# EAGLE board Smersh2 (EAGLE 9.1.3)
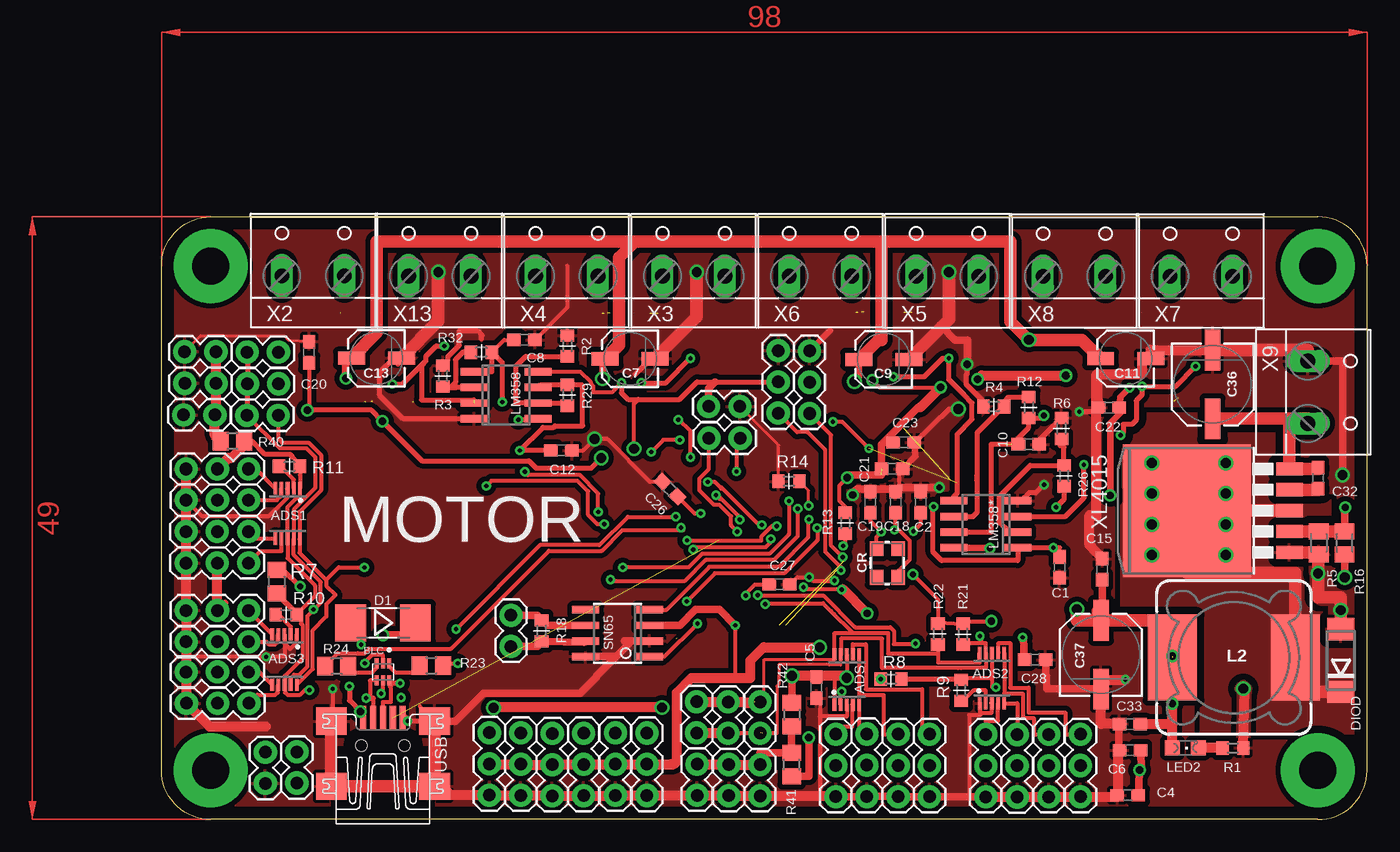
[diagram p0: board, top side]
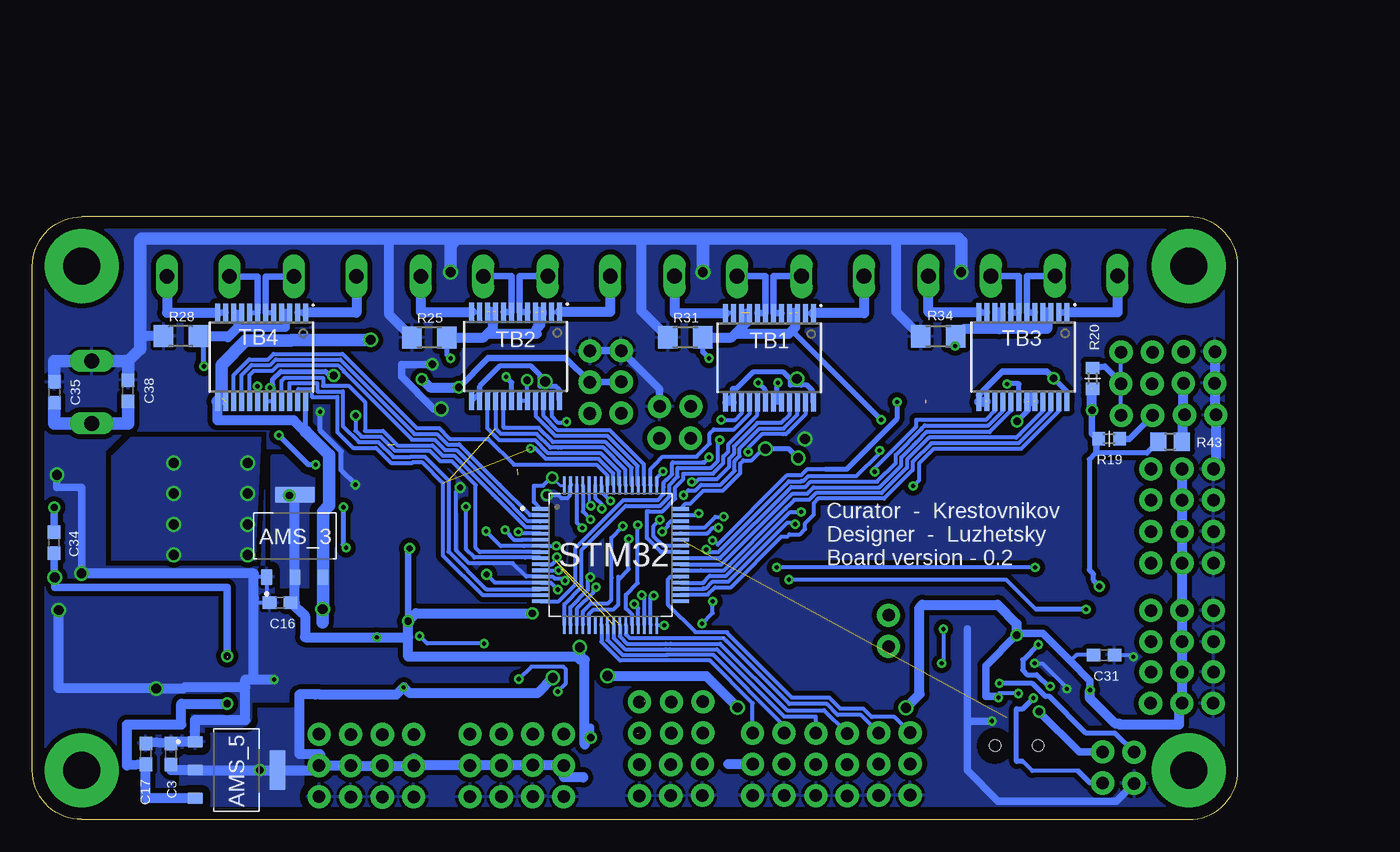
[diagram p1: board, bottom side, seen from below]

Size 98 x 49 mm. Coordinates in mm from the lower left corner, seen from the top.
Outline: 4,49 94,49 arc-90 98,45 98,4 arc-90 94,0 4,0 arc-90 0,4 0,45 arc-90 4,49
Copper layers (1*16): Top 0.035mm / dielectric 1.5mm / Bottom 0.035mm
Design rules "default *": minimum track width 6mil, minimum drill 0.35mm, track to track 2mil, track to pad 4mil, pad to pad 4mil, via to via 4mil, smd to smd 4mil, copper to edge 40mil, drill to drill 6mil, minimum pad ring 10mil, minimum via ring 8mil, stop-mask expansion 2mil, vias tented up to drill 10mm, thermal gap 10mil
Net classes: 0 default: clearance 0.205 mm

## Footprints (pad centres in the part's own frame; a part is rotated, then mirrored left to right if it is on the bottom)
MSOP10 = smd 0.3 x 1: 1 -1,-2.05; 2 -0.5,-2.05; 3 0,-2.05; 4 0.5,-2.05; 5 1,-2.05; 6 1,2.05; 7 0.5,2.05; 8 0,2.05; 9 -0.5,2.05; 10 -1,2.05
SOT229P700X180-4N = smd 1.31 x 0.93: 1 -3.345,2.29; 2 -3.345,0; 3 -3.345,-2.29 | smd 1.31 x 3.24: 4 3.345,0
SOT50P160X60-6N = smd 0.75 x 0.35: 1 -0.69,0.5; 2 -0.69,0; 3 -0.69,-0.5; 4 0.69,-0.5; 5 0.69,0; 6 0.69,0.5
C0603 = smd 1.1 x 1: 1 -0.85,0; 2 0.85,0
CSV-B = smd 2.184 x 1.067: + -2.032,0; - 2.032,0
CSV-D = smd 3.302 x 1.27: + -2.794,0; - 2.794,0
CRYSTAL-SMD-3.2X2.5MM = smd 1.2 x 1.1: 1 -1.175,-0.875; 2 1.175,-0.875; 3 1.175,0.875; 4 -1.175,0.875
MELF-MLL41 = smd 2.5 x 3: A 2.625,0; C -2.625,0
DO214AA = smd 1.8 x 2.2: A 2.55,0; C -2.55,0
1X02 = drill 1.016 pad 1.88: 1 0,0; 2 2.54,0
SSR1208 = smd 7 x 4: 1 0,5; 2 0,-5
CHIPLED_0805 = smd 1.2 x 1.2: A 0,-1.05; C 0,1.05
LM358 = smd 0.6 x 2.2: 1 -1.905,-2.6; 2 -0.635,-2.6; 3 0.635,-2.6; 4 1.905,-2.6; 5 1.905,2.6; 6 0.635,2.6; 7 -0.635,2.6; 8 -1.905,2.6
R0603 = smd 1 x 1.1: 1 -0.85,0; 2 0.85,0
M0805 = smd 1.3 x 1.6: 1 -0.95,0; 2 0.95,0
R0805 = smd 1.3 x 1.5: 1 -0.95,0; 2 0.95,0
R1206 = smd 1.6 x 1.803: 1 -1.422,0; 2 1.422,0
SOIC8 = smd 0.6 x 2.2: 1 -1.905,-2.6; 2 -0.635,-2.6; 3 0.635,-2.6; 4 1.905,-2.6; 5 1.905,2.6; 6 0.635,2.6; 7 -0.635,2.6; 8 -1.905,2.6
QFP50P1200X1200X160-64N = smd 1.47 x 0.28: 1 -5.67,3.75; 2 -5.67,3.25; 3 -5.67,2.75; 4 -5.67,2.25; 5 -5.67,1.75; 6 -5.67,1.25; 7 -5.67,0.75; 8 -5.67,0.25; 9 -5.67,-0.25; 10 -5.67,-0.75; 11 -5.67,-1.25; 12 -5.67,-1.75; 13 -5.67,-2.25; 14 -5.67,-2.75; 15 -5.67,-3.25; 16 -5.67,-3.75; 33 5.67,-3.75; 34 5.67,-3.25; 35 5.67,-2.75; 36 5.67,-2.25; 37 5.67,-1.75; 38 5.67,-1.25; 39 5.67,-0.75; 40 5.67,-0.25; 41 5.67,0.25; 42 5.67,0.75; 43 5.67,1.25; 44 5.67,1.75; 45 5.67,2.25; 46 5.67,2.75; 47 5.67,3.25; 48 5.67,3.75 | smd 0.28 x 1.47: 17 -3.75,-5.67; 18 -3.25,-5.67; 19 -2.75,-5.67; 20 -2.25,-5.67; 21 -1.75,-5.67; 22 -1.25,-5.67; 23 -0.75,-5.67; 24 -0.25,-5.67; 25 0.25,-5.67; 26 0.75,-5.67; 27 1.25,-5.67; 28 1.75,-5.67; 29 2.25,-5.67; 30 2.75,-5.67; 31 3.25,-5.67; 32 3.75,-5.67; 49 3.75,5.67; 50 3.25,5.67; 51 2.75,5.67; 52 2.25,5.67; 53 1.75,5.67; 54 1.25,5.67; 55 0.75,5.67; 56 0.25,5.67; 57 -0.25,5.67; 58 -0.75,5.67; 59 -1.25,5.67; 60 -1.75,5.67; 61 -2.25,5.67; 62 -2.75,5.67; 63 -3.25,5.67; 64 -3.75,5.67
SOP65P760X160-24N = smd 1.5 x 0.4: 1 -3.625,3.575; 2 -3.625,2.925; 3 -3.625,2.275; 4 -3.625,1.625; 5 -3.625,0.975; 6 -3.625,0.325; 7 -3.625,-0.325; 8 -3.625,-0.975; 9 -3.625,-1.625; 10 -3.625,-2.275; 11 -3.625,-2.925; 12 -3.625,-3.575; 13 3.625,-3.575; 14 3.625,-2.925; 15 3.625,-2.275; 16 3.625,-1.625; 17 3.625,-0.975; 18 3.625,-0.325; 19 3.625,0.325; 20 3.625,0.975; 21 3.625,1.625; 22 3.625,2.275; 23 3.625,2.925; 24 3.625,3.575
1X03 = drill 1.016 pad 1.88: 1 0,0; 2 2.54,0; 3 5.08,0
UX60-MB-5ST = smd 2 x 0.5: 1 2.25,1.6; 2 2.25,0.8; 3 2.25,0; 4 2.25,-0.8; 5 2.25,-1.6 | smd 2.2 x 2.5: M1 -3.3,-4.2; M2 -3.3,4.2; M3 2,4.2; M4 2,-4.2 | hole 0.9: 0,-1.75; 0,1.75
W237-132 = drill 1.194 long: 1 -2.54,-0.635; 2 2.54,-0.635
TO263-5L = smd 1.067 x 2.159: 1 -3.404,-4.521; 2 -1.702,-4.521; 3 0,-4.521; 4 1.702,-4.521; 5 3.404,-4.521 | smd 10.8 x 10.41: 6 0,3.81

## Placement (x,y rotation side)
ADS  ADS1115IRUGT  [MSOP10]  55.7,11.38 0 top
ADS1  ADS1115IRUGT  [MSOP10]  10.25,24.88 180 top
ADS2  ADS1115IRUGT  [MSOP10]  67.5,11.5 0 top
ADS3  ADS1115IRUGT  [MSOP10]  10,13 180 top
AMS_3  AMS1117  [SOT229P700X180-4N]  76.67,23.06 90 bottom
AMS_5  AMS1117  [SOT229P700X180-4N]  81.42,4.02 0 bottom
BLC  USBLC6-2P6  [SOT50P160X60-6N]  18,12 270 top
C1  0.1uF  [C0603]  73,20.5 270 top
C2  100n  [C0603]  61.71,25.81 90 top
C3  0.1u  [C0603]  86.73,5.33 90 bottom
C4  0.1u  [C0603]  78.54,1.97 0 top
C5  0.1u  [C0603]  53.24,10.72 90 top
C6  0.1u  [C0603]  78.72,5.63 0 top
C7  100u  [CSV-B]  38.09,37.46 0 top
C8  0.1uF  [C0603]  29.5,39 0 top
C9  100u  [CSV-B]  58.71,37.41 0 top
C10  0.1uF  [C0603]  70.5,30.5 0 top
C11  100u  [CSV-B]  78.37,37.47 0 top
C12  0.1uF  [C0603]  32.5,30 0 top
C13  100u  [CSV-B]  17.47,37.51 0 top
C15  0.1u  [C0603]  76.46,20.34 90 top
C16  0.1u  [C0603]  77.86,17.63 180 bottom
C17  0.1u  [C0603]  88.77,5.34 90 bottom
C18  22pF  [C0603]  59.67,25.81 90 top
C19  22pF  [C0603]  57.62,25.8 90 top
C20  0.1uF  [C0603]  12,38 90 top
C21  0.1uF  [C0603]  59.4,28.51 0 top
C22  0.1uF  [C0603]  77,33.5 180 top
C23  4.7uF <- to 48 pin  [C0603]  60.34,30.66 0 top
C26  0.1uF  [C0603]  41.33,26.86 135 top
C27  0.1uF  [C0603]  50.23,19.12 0 top
C28  0.1u  [C0603]  71,13 180 top
C31  0.1u  [C0603]  10.89,13.37 180 bottom
C32  0.1u  [C0603]  94.01,27.76 270 top
C33  0.1u  [C0603]  78.71,7.76 180 top
C34  33n  [C0603]  96.23,22.5 90 bottom
C35  0.1u  [C0603]  96.21,34.73 90 bottom
C36  220u  [CSV-D]  85.44,35.38 90 top
C37  330u  [CSV-D]  76.37,13.4 270 top
C38  0.1µF  [C0603]  90.22,34.87 270 bottom
CR  8M  [CRYSTAL-SMD-3.2X2.5MM]  58.99,20.85 90 top
D1  [MELF-MLL41]  18,16 180 top
DIOD  SK54  [DO214AA]  95.87,12.93 90 top
J1  [1X02]  11,5.5 270 top
J2  [1X02]  8.44,5.47 270 top
J23  [1X02]  44.5,31 0 top
J25  [1X02]  44.47,33.58 0 top
J27  [1X02]  28.41,14.07 90 top
J28  [1X02]  9.52,35.43 180 top
J29  [1X02]  4.43,35.47 180 top
J30  [1X02]  43.5,9.58 270 top
J31  [1X02]  46.11,4.47 270 top
J32  [1X02]  46.06,9.56 270 top
J33  [1X02]  48.65,4.46 270 top
J34  [1X02]  48.65,9.56 270 top
J35  [1X02]  43.53,4.5 270 top
J36  [1X02]  9.48,32.86 180 top
J37  [1X02]  4.34,32.9 180 top
J38  [1X02]  9.5,38 180 top
J39  [1X02]  4.42,38.03 180 top
L2  SRR1208  [SSR1208]  87.16,13.17 270 top
LED2  [CHIPLED_0805]  83.22,5.82 270 top
LM358  LM358  [LM358]  28,34.5 270 top
LM358*  LM358  [LM358]  67,24 90 top
R1  1k  [R0603]  87.09,5.81 0 top
R2  50  [R0603]  33,38.5 90 top
R3  50  [R0603]  22.87,36.06 90 top
R4  50  [R0603]  67.65,33.58 180 top
R5  3k  [M0805]  94.07,22.49 90 top
R6  50  [R0603]  73.15,31.79 90 top
R7  120Ohm - ???  [R0805]  9.36,19.35 270 top
R8  10k  [R0603]  59.3,11.42 0 top
R9  10k  [R0603]  65,10.5 90 top
R10  10k  [R0603]  10.13,16.66 180 top
R11  10k  [R0603]  10.4,28.71 180 top
R12  1k  [R0603]  70.5,33.5 90 top
R13  10k  [R0603]  55.59,24.1 90 top
R14  10k  [R0603]  51,27.5 180 top
R16  113k  [M0805]  96.17,22.49 270 top
R18  120Ohm - ???  [R0603]  30.89,15.34 90 top
R19  47k  [R0603]  10.47,30.95 0 bottom
R20  47k  [R0603]  11.82,35.86 90 bottom
R21  47k  [R0603]  65.15,15.07 270 top
R22  47k  [R0603]  63.11,15.08 270 top
R23  22  [R0805]  21.93,12.52 0 top
R24  22  [R0805]  14.23,12.46 180 top
R25  0.05  [R1206]  65.72,39.19 0 bottom
R26  1k  [R0603]  73.36,27.94 90 top
R28  0.05  [R1206]  85.92,39.3 0 bottom
R29  1k  [R0603]  33,34.5 270 top
R31  0.05  [R1206]  44.92,39.2 0 bottom
R32  1k  [R0603]  26,38 180 top
R34  0.05  [R1206]  24.36,39.28 0 bottom
R40  0  [R0805]  5.76,30.76 180 top
R41  0  [R0805]  51.22,4.46 90 top
R42  0  [R0805]  51.24,8.53 270 top
R43  0  [R0805]  5.51,30.73 0 bottom
SN65  SN65HVD233DR  [SOIC8]  37.07,15.15 90 top
STM32  STM32F405RGT6  [QFP50P1200X1200X160-64N]  51,21.5 0 bottom
TB1  TB6612FNG,C,8,EL  [SOP65P760X160-24N]  38.09,37.54 270 bottom
TB2  TB6612FNG,C,8,EL  [SOP65P760X160-24N]  58.72,37.65 270 bottom
TB3  TB6612FNG,C,8,EL  [SOP65P760X160-24N]  17.47,37.6 270 bottom
TB4  TB6612FNG,C,8,EL  [SOP65P760X160-24N]  79.37,37.59 270 bottom
TLE4945L1  455-1750-1-ND  [1X03]  62.43,1.85 90 top
TLE4945L2  455-1750-1-ND  [1X03]  59.88,1.85 90 top
TLE4945L3  455-1750-1-ND  [1X03]  54.81,1.85 90 top
TLE4945L4  455-1750-1-ND  [1X03]  2,28.5 0 top
TLE4945L5  455-1750-1-ND  [1X03]  1.99,20.86 0 top
TLE4945L6  455-1750-1-ND  [1X03]  1.99,23.41 0 top
TLE4945L7  455-1750-1-ND  [1X03]  2,25.97 0 top
TLE4945L8  455-1750-1-ND  [1X03]  67,1.84 90 top
TLE4945L9  455-1750-1-ND  [1X03]  74.7,1.85 90 top
TLE4945L10  455-1750-1-ND  [1X03]  57.34,1.87 90 top
TLE4945L11  455-1750-1-ND  [1X03]  72.12,1.84 90 top
TLE4945L12  455-1750-1-ND  [1X03]  69.55,1.83 90 top
TLE4945L13  455-1750-1-ND  [1X03]  2,17 0 top
TLE4945L14  455-1750-1-ND  [1X03]  2.02,9.45 0 top
TLE4945L15  455-1750-1-ND  [1X03]  2,12 0 top
TLE4945L16  455-1750-1-ND  [1X03]  2,14.45 0 top
TLE4945L17  455-1750-1-ND  [1X03]  50.13,33.04 90 top
TLE4945L18  455-1750-1-ND  [1X03]  52.67,33.01 90 top
TLE4945L19  455-1750-1-ND  [1X03]  39.46,7.03 270 top
TLE4945L20  455-1750-1-ND  [1X03]  36.89,7.04 270 top
TLE4945L21  455-1750-1-ND  [1X03]  34.31,7.02 270 top
TLE4945L22  455-1750-1-ND  [1X03]  31.76,7 270 top
TLE4945L23  455-1750-1-ND  [1X03]  29.2,7.04 270 top
TLE4945L24  455-1750-1-ND  [1X03]  26.65,7.06 270 top
USB  MINI-USB-SHIELD-UX60-MB-5ST  [UX60-MB-5ST]  18,6 90 top
X2  [W237-132]  12.33,44.83 0 top
X3  [W237-132]  43.26,44.81 0 top
X4  [W237-132]  32.94,44.81 0 top
X5  [W237-132]  63.89,44.8 0 top
X6  [W237-132]  53.57,44.81 0 top
X7  [W237-132]  84.52,44.79 0 top
X8  [W237-132]  74.2,44.79 0 top
X9  [W237-132]  93.81,34.74 270 top
X13  [W237-132]  22.62,44.82 0 top
XL4015  XL4015  [TO263-5L]  87.16,25.11 90 top

## Library data of the parts
ADS ADS1-ADS3 = ADS1115IRUGT; AVAILABILITY: Unavailable; DESCRIPTION: 16 Bit Analog to Digital Converter 2, 4 Input 1 Sigma-Delta 10-X2QFN _2x1.5_; MF: Texas Instruments; MP: ADS1115IRUGT; PACKAGE: XFQFN-10 Texas Instruments; PRICE: None
AMS_3 AMS_5 = AMS1117; AVAILABILITY: Unavailable; DESCRIPTION: 1A LOW DROPOUT VOLTAGE REGULATOR; MF: Seeed Technology; MP: AMS1117; PACKAGE: SOT-223 Seeed Technology; PRICE: None
BLC = USBLC6-2P6; AVAILABILITY: Unavailable; DESCRIPTION: 17V Clamp 5A _8/20µs_ Ipp Tvs Diode Surface Mount SOT-666; MF: STMicroelectronics; MP: USBLC62P6; PACKAGE: SOT-563 STMicroelectronics; PRICE: None
C1-C6 C8 C10 C12 C15-C23 C26-C28 C31-C35 R2-R4 R6-R14 R18-R26 R28 R29 R31 R32 R34 R40-R43 = resistor
C7 C9 C11 C13 C36 C37 = rc-master-smd
C38 R1 = rcl
CR = SparkFun-Clocks
D1 = diode
DIOD = DO214AA
J1 J2 J23 J25 J27-J39 = SparkFun-Connectors
L2 = srr1208
LED2 = led
LM358 LM358* = lm358
R5 R16 = rcl@1; SPICEPREFIX: R
SN65 = SN65HVD233DR; AVAILABILITY: Unavailable; DESCRIPTION: 3.3V CAN Transceiver with Standby Mode, Loop-back 8-SOIC -40 to 125; MF: Texas Instruments; MP: SN65HVD233DR; PACKAGE: SOIC-8 Texas Instruments; PRICE: None
STM32 = STM32F405RGT6; AVAILABILITY: Unavailable; DESCRIPTION: ARM® Cortex®-M4 STM32F4 Microcontroller IC 32-Bit 168MHz 1MB _1M x 8_ FLASH 64-LQFP _10x10_; MF: STMicroelectronics; MP: STM32F405RGT6; PACKAGE: LQFP-64 STMicroelectronics; PRICE: None
TB1-TB4 = TB6612FNG_C_8_EL; AVAILABILITY: Unavailable; DESCRIPTION: Motor Driver Power MOSFET Parallel 24-SSOP; MF: Toshiba; MP: TB6612FNG,C,8,EL; PACKAGE: SSOP-24 Toshiba; PRICE: None
TLE4945L1-TLE4945L24 = SparkFun-Connectors; PROD_ID: XXX-00000
USB = usb_con-update
X2-X9 X13 = con-wago-508; OC_FARNELL: unknown; OC_NEWARK: unknown
XL4015 = XL4015

## Nets
+3V3: AMS_3.2 AMS_3.4 C16.1 C20.1 C21.1 C22.1 C23.1 C28.2 J25.1 LM358*.8 LM358.8 R7.1 R13.2 R19.1 R20.1 R21.1 R22.1 R41.1 R43.1 SN65.3 STM32.1 STM32.13 STM32.19 STM32.32 STM32.48 STM32.64 TB1.19 TB1.20 TB2.19 TB2.20 TB3.19 TB3.20 TB4.19 TB4.20 TLE4945L17.2 TLE4945L18.2 TLE4945L19.2 TLE4945L20.2 TLE4945L21.2 TLE4945L22.2 TLE4945L23.2 TLE4945L24.2
+5V: ADS1.1 ADS1.8 ADS2.8 ADS3.8 ADS.1 ADS.8 AMS_5.2 AMS_5.4 BLC.5 C3.1 C4.2 C5.2 C6.2 C31.2 D1.C R7.2 R8.2 R9.2 R10.1 R11.1 R40.1 R42.1 TLE4945L1.2 TLE4945L2.2 TLE4945L3.2 TLE4945L4.2 TLE4945L5.2 TLE4945L6.2 TLE4945L7.2 TLE4945L8.2 TLE4945L9.2 TLE4945L10.2 TLE4945L11.2 TLE4945L12.2 TLE4945L13.2 TLE4945L14.2 TLE4945L15.2 TLE4945L16.2
+6V: AMS_3.3 AMS_5.3 C7.+ C9.+ C11.+ C13.+ C15.1 C17.1 C33.1 C34.1 C37.+ L2.2 LED2.A R16.2 TB1.13 TB1.14 TB1.24 TB2.13 TB2.14 TB2.24 TB3.13 TB3.14 TB3.24 TB4.13 TB4.14 TB4.24
+VIN: C32.1 C35.1 C36.+ C38.2 X9.2 XL4015.5
A0: STM32.14
ADC_1: STM32.37 TLE4945L24.1
ADC_2: STM32.27 TLE4945L23.1
ADC_3: STM32.10 STM32.26 TLE4945L18.1 TLE4945L22.1
ADC_4: STM32.11 STM32.25 TLE4945L17.1 TLE4945L21.1
ADC_5: STM32.24 TLE4945L20.1
ADC_6: STM32.23 TLE4945L19.1
ADC_8: STM32.22
CAN_RX1: SN65.4 STM32.61
CAN_TX1: SN65.1 STM32.62
CANH2: J27.1 R18.1 SN65.7
CANL2: J27.2 R18.2 SN65.6
CURRENT_1: C10.1 LM358*.7 R12.1 STM32.8
CURRENT_2: C1.1 LM358*.1 R26.1 STM32.9
CURRENT_3: C12.1 LM358.7 R29.1 STM32.21
CURRENT_4: C8.1 LM358.1 R32.1 STM32.20
D1: STM32.41 TB1.17
D2: STM32.42 TB1.22
D3: STM32.50 TB1.16
D4: STM32.28 TB1.21
D5: STM32.33
D6: STM32.34 TB3.22
D7: STM32.38 TB3.21
D8: STM32.39 TB3.17
D9: STM32.40 TB3.16
D10: STM32.51 TB2.22
D11: STM32.52 TB2.21
D12: STM32.53 TB2.17
D13: STM32.2 TB4.16
D14: STM32.3 TB4.17
D15: STM32.4 TB4.21
D16: STM32.54 TB2.16 TB4.22
D+: BLC.6 J2.1 USB.3
D-: BLC.4 J1.2 USB.2
DATA0: ADS.4 TLE4945L3.3
DATA1: ADS.5 TLE4945L10.3
DATA2: ADS.6 TLE4945L2.3
DATA3: ADS.7 TLE4945L1.3
DATA4: ADS1.4 TLE4945L7.3
DATA5: ADS1.5 TLE4945L4.3
DATA6: ADS1.6 TLE4945L6.3
DATA7: ADS1.7 TLE4945L5.3
DATA8: ADS2.4 TLE4945L8.3
DATA9: ADS2.5 TLE4945L12.3
DATA10: ADS2.6 TLE4945L11.3
DATA11: ADS2.7 TLE4945L9.3
DATA12: ADS3.4 TLE4945L16.3
DATA13: ADS3.5 TLE4945L13.3
DATA14: ADS3.6 TLE4945L15.3
DATA15: ADS3.7 TLE4945L14.3
GND: ADS1.3 ADS2.1 ADS2.3 ADS3.1 ADS3.3 ADS.3 AMS_3.1 AMS_5.1 BLC.2 C1.2 C2.2 C3.2 C4.1 C5.1 C6.1 C7.- C8.2 C9.- C10.2 C11.- C12.2 C13.- C15.2 C16.2 C17.2 C18.2 C19.2 C20.2 C21.2 C22.2 C23.2 C26.2 C27.2 C28.1 C31.1 C33.2 C35.2 C36.- C37.- C38.1 DIOD.A J2.2 J25.2 J29.2 J31.2 J33.2 J35.2 J37.2 J39.2 LM358*.4 LM358.4 R1.2 R2.2 R3.2 R4.2 R5.1 R6.2 R14.2 R25.1 R28.1 R31.1 R34.1 SN65.2 SN65.8 STM32.12 STM32.18 STM32.63 TLE4945L1.1 TLE4945L2.1 TLE4945L3.1 TLE4945L4.1 TLE4945L5.1 TLE4945L6.1 TLE4945L7.1 TLE4945L8.1 TLE4945L9.1 TLE4945L10.1 TLE4945L11.1 TLE4945L12.1 TLE4945L13.1 TLE4945L14.1 TLE4945L15.1 TLE4945L16.1 TLE4945L17.3 TLE4945L18.3 TLE4945L19.3 TLE4945L20.3 TLE4945L21.3 TLE4945L22.3 TLE4945L23.3 TLE4945L24.3 USB.5 USB.M1 USB.M2 USB.M3 USB.M4 X9.1 XL4015.1
MOTOR_1: LM358*.3 R28.2 TB4.3 TB4.4 TB4.9 TB4.10 TB4.18
MOTOR_2: LM358.5 R31.2 TB1.3 TB1.4 TB1.9 TB1.10 TB1.18
MOTOR_3: LM358*.5 R25.2 TB2.3 TB2.4 TB2.9 TB2.10 TB2.18
MOTOR_4: LM358.3 R34.2 TB3.3 TB3.4 TB3.9 TB3.10 TB3.18
N$1: ADS.2 R8.1
N$2: LED2.C R1.1
N$3: D1.A J1.1 USB.1
N$4: ADS2.2 R9.1
N$6: TB1.1 TB1.2 X4.1
N$7: C32.2 XL4015.4
N$8: TB1.5 TB1.6 X4.2
N$9: DIOD.C L2.1 XL4015.3 XL4015.6
N$10: TB1.11 TB1.12 X3.2
N$11: TB1.7 TB1.8 X3.1
N$12: C2.1 R13.1 STM32.7
N$13: C19.1 CR.3 STM32.5
N$14: TB2.1 TB2.2 X6.1
N$15: TB2.5 TB2.6 X6.2
N$16: C18.1 CR.1 STM32.6
N$17: ADS3.2 R10.2
N$18: TB2.11 TB2.12 X5.2
N$19: ADS1.2 R11.2
N$20: R14.1 STM32.60
N$22: C26.1 STM32.47
N$23: TB2.7 TB2.8 X5.1
N$29: LM358*.6 R4.1 R12.2
N$31: LM358*.2 R6.1 R26.2
N$32: C34.2 R5.2 R16.1 XL4015.2
N$33: TB4.1 TB4.2 X8.1
N$34: TB4.5 TB4.6 X8.2
N$35: TB4.11 TB4.12 X7.2
N$36: TB4.7 TB4.8 X7.1
N$38: LM358.6 R2.1 R29.2
N$41: TB3.1 TB3.2 X2.1
N$42: TB3.5 TB3.6 X2.2
N$43: TB3.11 TB3.12 X13.2
N$44: TB3.7 TB3.8 X13.1
N$45: C27.1 STM32.31
N$48: LM358.2 R3.1 R32.2
N$49: BLC.1 R23.1
N$50: BLC.3 R24.1
N$53: J31.1 J33.1 J35.1 R41.2 R42.2
N$55: J29.1 J37.1 J39.1 R40.2 R43.2
PW_2: STM32.56
PW_3: STM32.16 TB1.15
PW_4: STM32.17 TB1.23
PW_5: STM32.55 TB2.15
PW_6: STM32.57 TB4.15
PW_7: STM32.15 TB2.23 TB4.23
PW_10: STM32.35 TB3.23
PW_20: STM32.36 TB3.15
SCL1: ADS1.10 ADS3.10 J28.1 J36.1 J38.1 R20.2 STM32.58
SCL2: ADS2.10 ADS.10 J30.1 J32.1 J34.1 R22.2 STM32.29
SDA1: ADS1.9 ADS3.9 J28.2 J36.2 J38.2 R19.2 STM32.59
SDA2: ADS2.9 ADS.9 J30.2 J32.2 J34.2 R21.2 STM32.30
SWCLK: J23.2 STM32.49
SWDIO: J23.1 STM32.46
USB_OTG_DM: R24.2 STM32.44
USB_OTG_DP: R23.2 STM32.45
USB_OTG_ID: STM32.43 USB.4

## Tracks (layer width: path | path; a pad name or v marks a point on that pad's centre or on a via)
+3V3  (via drill 0.35, 0.5, 0.6, 0.65, 0.8)  (5 unrouted)
  Top 0.305: v67.45,16.12 65.25,16.12 R21.1 63.11,16.02 R22.1 63.11,17.89 v61.08,19.92 | C20.1 12,33.42 v11.86,33.28 | v63.32,35.14 58.36,35.14 v57.79,35.71 | R13.2 55.59,25.41 55.11,25.9 55.11,27.17 v55.73,27.79 | v38.4,30.14 38.4,33.79 38.76,34.15 | v52.18,18.89 52.35,18.72 55.25,18.72 v55.28,18.69 | C23.1 59.23,30.5 58.5,30.5 | v46.63,15.79 46.63,11.55 46.58,11.5 | v37.39,35.52 36.6,34.73 35.11,34.73 35.11,35.22 34.9,35.43 34.9,35.55 34.05,36.4 31.21,36.4 31.18,36.37 30.64,36.37 LM358.8
  Top 0.406: 77.11,31.38 v77.11,26.35 | v37.39,35.52 37.39,34.69 37.93,34.15 38.76,34.15 42.11,34.15 43.54,35.58 45,35.58 TLE4945L17.2 | v11.86,33.28 17.06,33.28 v17.95,32.39 21.17,29.17 29.86,29.17 30.46,28.57 34.93,28.57 v35.75,29.39 | R7.1 9.9,20.3 v11.26,18.95
  Top 0.508: v77.11,26.35 77.11,32.23 77.95,33.07 C22.1 77.95,34.37 v78.68,35.1 | v67.34,22.03 67.28,22.09 LM358*.8
  Top 0.61: R41.1 52.62,3.51 v52.62,6.66 | C28.2 70.05,14.81 v70,14.81 | 61.68,33.5 61.5,33.5 58.5,30.5 58.5,28 55.94,28 v55.73,27.79 | J25.1 44.47,35.05 45,35.58 | SN65.3 42.12,15.79 43.41,17.07 45.35,17.07 v46.63,15.79
  Top 0.813: v73.5,36.11 66.65,36.11 v66.33,35.79 | v63.32,35.14 61.68,33.5 | v57.35,16.76 55.42,18.69 55.3,18.69 v55.29,18.68 | v53.5,14 48.94,14 47.87,12.93 47.87,11.5 46.58,11.5 43.07,11.5 41.88,10.31 41.88,4.72 41.65,4.49 TLE4945L19.2 | TLE4945L24.2 26.67,4.5 TLE4945L23.2 29.24,4.46 TLE4945L22.2 31.78,4.48 TLE4945L21.2 34.33,4.5 TLE4945L20.2 TLE4945L19.2 | TLE4945L19.2 41.45,4.49
  Bottom 0.254: 55.77,27.84 v55.73,27.79 55.11,27.17 STM32.64
  Bottom 0.305: TB4.20 TB4.19 | 57.79,34.02 TB2.19 | 57.79,34.02 v57.79,35.71 | 55.77,27.84 56.47,27.14 57.23,27.14 57.23,25.81 STM32.1 | v61.08,19.92 60.41,19.25 STM32.13 55.84,19.25 55.7,19.11 v55.28,18.69 | STM32.48 44.89,25.69 44.52,25.69 43.46,26.75 41.86,26.75 40.45,28.16 40.45,28.95 40.21,29.2 39.54,29.2 38.59,30.14 v38.4,30.14 | v52.18,18.89 52.4,18.67 52.4,18.48 53.75,17.12 STM32.19 | STM32.32 46.67,15.83 v46.63,15.79 | TB2.20 57.79,34.02 | v37.39,35.52 37.5,35.41
  Bottom 0.406: TB4.20 78.39,35.1 v78.68,35.1 78.68,35.13 78.45,35.36 78.45,35.8 77.81,36.44 74.17,36.44 73.87,36.15 | v77.11,26.35 76.72,26.35 AMS_3.4 | R43.1 7.39,29.8 11.5,29.8 11.58,29.8 12.1,29.28 12.1,20.3 11.75,19.96 11.75,19.44 v11.26,18.95 | TB1.20 37.5,33.91 | 37.5,33.91 TB1.19 | 37.5,35.41 37.5,33.91 | 17.04,33.98 17.04,33.3 v17.95,32.39 | v35.75,29.39 36.5,30.14 v38.4,30.14
  Bottom 0.508: v11.86,33.28 11.86,31.39 R19.1 11.5,30.87 11.5,29.8 | v73.5,36.11 73.54,36.15 73.82,36.15 | TLE4945L17.2 52.64,35.58 TLE4945L18.2 54.64,37.52 60.94,37.52 v63.32,35.14 | v67.45,16.12 67.45,21.92 v67.34,22.03
  Bottom 0.61: v52.62,6.66 52.62,7.5 53.11,7.5
  Bottom 0.813: AMS_3.4 AMS_3.2 76.67,17.63 C16.1 75.84,16.56 75.84,14.81 v70,14.81 67.45,14.81 | 67.45,14.81 v67.45,16.12 66.81,16.76 v57.35,16.76 | 53.11,6.1 53.11,7.5 53.11,13.01 53.5,13.01 53.5,13.23 | 67.45,14.81 67.45,13.23 53.5,13.23 | 11.86,35.03 v11.86,33.28 | 16.83,34.29 17.04,34.08 17.04,33.98 16.6,33.98 | v66.33,35.79 65.68,35.14 v63.32,35.14 | v53.5,14 53.5,13.23 | TLE4945L19.2 41.45,4.49
  pour Bottom (isolate 0.61, no thermals): 74.5,27.5 76.5,29.5 78.5,29.5 78.5,19 74.5,19
+5V  (via drill 0.35, 0.6, 0.8)
  Top 0.305: ADS2.8 67.5,11.5 | 67.5,11.5 67.5,10.75 v67.82,10.75 | ADS.8 v55.7,11.51 | ADS.1 54.7,11.53 55.68,11.53 v55.7,11.51 | v55.7,11.51 53.4,11.51 C5.2 | BLC.5 17.99,10.38 v17.85,10.24 | v12.02,10.52 11.65,10.52 11.28,10.14 10.22,10.14 10.04,10.32 10.04,10.9 ADS3.8 10.04,10.99 10.04,11.7 11.46,13.11 11.46,15.82 11.34,15.94 11.34,17 11.34,17.05 12.48,18.19 12.48,19.02 10.25,21.25 ADS1.8 10.25,25.41 10.96,26.12 11.03,26.12 11.25,26.35 ADS1.1 11.25,27 | 11.25,27 11.25,28 11.25,28.28 11.25,28.88 10.66,29.47 | R9.2 65.15,11.5 67.5,11.5 | R11.1 11.25,27 | R10.1 9.36,18.28 R7.2
  Top 0.406: 10.66,29.47 10.66,29.48 10.45,29.69 8.43,29.69 7.36,30.76 R40.1 | R7.2 10.76,17 11.34,17 | R8.2 64.93,11.42 R9.2
  Top 0.508: 5.16,17.62 TLE4945L13.2
  Top 0.61: C6.2 79.67,4.02 | R42.1 v51.24,11.67 C5.2 | C4.2 79.49,3.84 79.67,4.02 | v79.5,4.02 79.67,4.02 | v18,15 19.38,15 19.7,15.08 D1.C
  Top 0.813: TLE4945L13.2 TLE4945L5.2 | v26.99,9.08 27.01,9.1 v40.67,9.1 | v55.7,11.51 55.54,11.67 v51.24,11.67 | TLE4945L4.2 5.44,29.4 5.71,29.4 6.71,30.39 R40.1
  Bottom 0.305: v17.85,10.24 19.47,10.24 19.47,10 v19.47,9.91 | C31.2 13.13,13.37 13.62,12.88
  Bottom 0.508: TLE4945L5.2 4.53,21 TLE4945L6.2 4.53,23.53 5,24 | TLE4945L7.2
  Bottom 0.61: 19.47,10 20.5,10 20.5,12.5 v18,15 17.86,15.14 15.87,15.14 13.62,12.88 12.02,11.29 v12.02,10.52
  Bottom 0.813: C3.1 86.73,4.02 AMS_5.2 v79.5,4.02 AMS_5.4 74.7,4.02 | 74.7,4.02 TLE4945L9.2 TLE4945L11.2 TLE4945L12.2 | TLE4945L12.2 | TLE4945L12.2 TLE4945L8.2 | 74.7,4.02 74.62,4.02 74.62,5.33 76.3,5.33 76.3,10.16 75,10.16 74.62,10.16 68.41,10.16 v67.82,10.75 67.33,10.26 56.95,10.26 v55.7,11.51 | 67,4.99 TLE4945L8.2 | 53.21,3.43 53.21,3.45 54.81,3.45 TLE4945L3.2 57.34,4.39 TLE4945L10.2 59.88,4.41 TLE4945L2.2 TLE4945L1.2 TLE4945L8.2 | v12.02,10.52 12.02,9.85 9.95,7.78 9.67,7.78 9.61,7.72 4.78,7.72 4.78,9.23 TLE4945L14.2 4.54,9.47 TLE4945L15.2 TLE4945L16.2 TLE4945L13.2 4.54,20.99 4.53,21 | v51.24,11.67 43.24,11.67 v40.67,9.1 | v26.99,9.08 25.89,10.18 25.89,17.23 25.67,17.45 19.53,17.45 18,15.92 v18,15 | TLE4945L5.2 TLE4945L6.2 TLE4945L7.2 | TLE4945L7.2 TLE4945L4.2
  pour Bottom (isolate 0.61, no thermals): 76,0 86,0 86,9 76,9
+6V  (via drill 0.6, 0.8)  (3 unrouted)
  Top 0.508: C9.+ 56.68,35.97 v56.32,35.61 | v35.86,35.83 35.86,37.26 C7.+
  Top 0.61: R16.2 v96.17,19.69 v96.18,19.69 | C15.1 76.46,16.28 C37.+ | C13.+ 14.98,37.05 v14.98,35.86
  Top 0.813: 82.16,16.19 L2.2 v82.16,9.41 82.16,7.76 | 76.46,17 76,17 76,16.19 C37.+ | C33.1 82.16,7.76 | LED2.A 82.17,7.76 82.16,7.76
  Top 1.016: 82.16,16.19 C37.+ 74.41,16.19 v74.41,17.1 | 58.5,47 68.5,47 69,47 69,40.5 v70.5,39 74.81,39 C11.+ | 58.5,47 58.5,39 58.27,39 C9.+ | 58.5,47 38.5,47 | 38.5,47 37.19,45.69 37.19,38.6 C7.+ | C13.+ 17.5,39.57 17.5,47 38.5,47
  Bottom 0.406: v14.98,35.86 14.06,34.94 13.88,34.76 13.88,33.99 TB3.24 | 21.05,34.51 TB3.13 | TB4.24 75.8,31.54 75.8,31.48 | TB2.24 55.19,34.07 55.19,34.94 55.46,35.22 56.5,35.22 | 56.5,35.22 56.74,35.22 56.74,36 56.74,36.14 57.46,36.86 60.03,36.86 61.65,35.24 | 61.65,35.24 TB2.14 | TB2.13 61.65,34.67 61.65,35.24 | 56.5,35.22 56.5,35.61 v56.32,35.61 | TB1.24 34.56,33.96 34.56,34.83 35.03,35.31 35.5,35.31 | 35.5,35.31 36.39,35.31 36.39,35.83 36.93,36.37 39.44,36.37 40.77,35.04 41.09,35.04 | 41.09,35.04 41.02,34.97 TB1.14 | TB1.13 41.09,34.49 41.09,35.04 | 35.5,35.31 35.86,35.67 v35.86,35.83
  Bottom 0.508: TB1.14 TB1.13 | 21.05,34.51 19.13,36.42 15.54,36.42 v14.98,35.86
  Bottom 0.61: C34.1 96.23,19.69 v96.18,19.69 96.18,18.87 82.16,18.87 v82.16,13.27
  Bottom 0.813: v74.41,17.1 74.38,17.1 | AMS_5.3 88.77,1.73 C17.1 90.31,4.39 90.31,7.73 85.9,7.73 85.9,9.41 v82.16,9.41 | TB3.13 20.5,33.98 | 75.8,31.48 76.76,32.45 82.94,32.45 TB4.13
  Bottom 1.016: 74.41,16.02 v74.41,17.1 | 74.38,17.1 AMS_3.3 74.38,25.02 73.88,25.52 73.88,29.62 75.8,31.54 | 82.63,36.97 82.63,34.28 TB4.13 | 82.63,36.97 | 82.63,36.97 80.66,38.94 76.99,38.94 76.93,39 v70.5,39
+VIN
  Top 1.016: C36.+ 93.17,32.59 X9.2 91.68,32.2 XL4015.5 94.01,28.51 C32.1
  Bottom 1.016: C38.2 90.22,32.2 X9.2 96.21,32.2 C35.1
ADC_1
  Bottom 0.305: STM32.37 45.37,19.71 46.16,19.71 46.37,19.5 46.37,17.5 44.11,15.24 41.5,15.24 41.5,15.14 41.08,14.72 36.26,9.9 33.22,9.9 32.33,9.01 30.45,9.01 29.76,8.32 29.74,8.34 27.93,8.34 TLE4945L24.1 27,7.41
ADC_2  (1 unrouted)
  Bottom 0.305: STM32.27 49.75,15.04 49.46,14.75 46,14.75 | 46,14.75 45.98,14.75 | 46,14.75 41.9,14.75 | 29.5,7.34 TLE4945L23.1 30.66,8.5 32.54,8.5 33.43,9.39 36.47,9.39 41.59,14.51 41.82,14.74
ADC_3  (via drill 0.35)  (1 unrouted)
  Top 0.305: v55.37,21.33 55.14,21.56 54.42,22.27 54.42,31.26 TLE4945L18.1
  Bottom 0.305: STM32.10 55.75,20.75 | 55.75,20.75 55.49,21.01 | 55.75,20.75 55.37,21.13 v55.37,21.33 | STM32.26 50.25,14.89 49.65,14.29 46.5,14.29 | 46.5,14.29 46.1,14.29 | 31.76,7.81 TLE4945L22.1 33.64,8.88 36.68,8.88 42.09,14.29 46.5,14.29
ADC_4  (via drill 0.35)  (1 unrouted)
  Top 0.305: v55.23,20.25 55.23,20.5 53.96,21.77 53.96,27 | 53.96,27 53.96,27.22 | 53.96,27 53.96,30.04 52.5,31.5 51.67,31.5 TLE4945L17.1
  Bottom 0.305: STM32.11 v55.23,20.25 55.14,20.34 54.96,20.34 | STM32.25 50.75,14.75 49.83,13.84 46.5,13.84 | 46.5,13.84 46.18,13.84 | 46.5,13.84 42.36,13.84 36.89,8.37 34.31,8.37 TLE4945L21.1
ADC_5
  Bottom 0.305: STM32.24 51.25,14.6 50.02,13.38 46.5,13.38 | 46.5,13.38 46.39,13.38 | 46.5,13.38 42.64,13.38 36.89,7.63 TLE4945L20.1
ADC_6
  Bottom 0.305: STM32.23 51.74,15.82 51.74,14.45 50.21,12.92 42.92,12.92 39.46,9.46 TLE4945L19.1
CAN_RX1  (via drill 0.35)
  Top 0.305: v52.62,24.4 52.56,24.34 52.56,22.94 50.17,20.55 44.53,20.55 41.04,17.05 SN65.4
  Bottom 0.305: STM32.61 53.25,25.03 v52.62,24.4
CAN_TX1  (via drill 0.35)
  Top 0.305: SN65.1 40.88,13.24 v43.56,15.92 | v42.7,17.73 44.98,20.02 50.62,20.02 53.3,22.7 v53.3,23.7
  Bottom 0.305: STM32.62 53.75,24.15 v53.3,23.7 | v43.56,15.92 42.7,16.79 v42.7,17.73
CANH2
  Top 0.61: J27.1 30.57,14.07 R18.1 34.34,14.39 SN65.7
CANL2
  Top 0.61: J27.2 30.57,16.61 R18.2 31.39,15.79 SN65.6
CURRENT_1  (via drill 0.5)  (1 unrouted)
  Top 0.406: v71.73,32.85 71.53,32.65 R12.1 70.5,31.89 69.11,30.5 67.44,30.5 67.44,23.36 LM358*.7 | C10.1 68.61,30.5
  Bottom 0.305: v71.73,32.85 71.73,31.61 71.25,31.14 69.69,31.14 68.52,29.97 65.67,29.97 64.82,29.11 63.89,29.11 | STM32.8 61.63,21.75 61.96,22.08 61.96,27.18 63.39,28.61 63.89,29.11 | 64,29.12 63.9,29.12 63.89,29.11
CURRENT_2  (via drill 0.35)
  Top 0.305: 63,25.5 63,25.38 62.83,25.38 62.72,25.38
  Top 0.406: 73,26.73 R26.1 73.36,26.04 v72.72,25.4 | 62.72,25.38 62.72,21.75 63.41,21.06 69.6,21.06 LM358*.1 v72.5,22.09 73,22.09 C1.1 | v62.77,25.44 62.83,25.38
  Bottom 0.305: STM32.9 56.71,21.29 57.94,21.29 62.06,21.29 62.73,21.96 62.73,25.4 v62.77,25.44
  Bottom 0.406: v72.5,22.09 72.74,22.34 72.74,25.38 v72.72,25.4
CURRENT_3  (via drill 0.35)
  Top 0.305: v49.53,22.81 49.53,22.56 49.11,22.14 43.42,22.14 v43.21,21.93
  Top 0.406: LM358.7 30.82,35.35 R29.1 34.15,35.35 34.24,35.26 34.24,32 31.98,32 31.87,31.89 31,31.89 v29.12,30.01 v29.13,30 C12.1
  Bottom 0.305: 42.25,21.75 42.23,21.77 | 42.23,21.77 36.5,27.5 35.5,27.5 35.46,27.54 35.31,27.54 34.93,27.93 31.01,27.93 29.12,29.82 v29.12,30.01 | STM32.21 52.75,16.71 52.38,17.08 50.77,17.08 50.37,17.48 50.37,19.5 | 50.37,19.5 50.37,19.75 | 50.37,19.5 49.53,20.34 v49.53,22.81 | v43.21,21.93 43.05,21.77 42.23,21.77
CURRENT_4  (via drill 0.35)
  Top 0.305: R32.1 27.85,39 C8.1 | v50,23.85 49.62,23.85 48.73,22.96 48.73,22.65 42.76,22.65 v42.72,22.69
  Top 0.406: LM358.1 26.85,36.41 R32.1 27.69,37.16 v27.69,33.94
  Bottom 0.305: 33.5,28.5 35,28.5 35.5,28 36.65,28 42.28,22.36 42.61,22.69 v42.72,22.69 | 53.21,15.87 STM32.20 53.25,16.92 52.59,17.58 51.22,17.58 50.94,17.86 50.94,19.63 | 50.94,19.63 50.92,19.65 | 50.94,19.63 50.94,22.91 v50,23.85
  Bottom 0.406: v27.69,33.94 27.69,32.62 31.8,28.5 33.5,28.5
D1
  Bottom 0.305: TB1.17 39.06,32.89 41.43,30.53 41.43,29.92 41.82,29.52 41.82,28.97 42.66,28.13 45.07,28.13 45.08,28.12 45.08,27.68 45.76,27 45.76,26.09 46.79,25.06 47.91,25.06 48.05,25.06 48.05,22.89 46.91,21.75 STM32.41
D2  (via drill 0.35)
  Top 0.305: v47,24.37 47,24.58 45.54,26.04 | 45.54,26.04 45.21,26.37 | 45.54,26.04 45.41,26.04 v45.08,26.37
  Bottom 0.305: 46.95,24.6 47,24.55 v47,24.37 47.49,23.88 47.49,23.03 46.71,22.25 STM32.42 | v45.08,26.37 44.69,26.75 44.1,26.75 43.65,27.21 42.05,27.21 40.91,28.35 40.91,29.14 40.51,29.54 40.51,30.15 38.88,31.78 36.94,31.78 35.81,32.91 TB1.22
D3
  Bottom 0.305: 47.79,27.21 STM32.50 47.75,28.52 47.38,28.89 | 47.38,28.89 47.33,28.94 | 47.38,28.89 46.77,29.5 44,29.5 42.94,30.56 42.94,31.37 42.6,31.71 40.97,31.71 39.72,32.96 TB1.16
D4  (via drill 0.35)
  Top 0.305: v44.4,27.44 44.98,27.44 45.5,26.91 45.5,27 48.55,23.95 v48.79,23.95
  Bottom 0.305: v44.4,27.44 44.06,27.44 43.84,27.66 42.38,27.66 41.37,28.68 41.37,29.33 40.97,29.73 40.97,30.34 39.07,32.24 37.13,32.24 36.47,32.91 TB1.21 | STM32.28 49.25,16.66 49.74,17.15 49.74,18.27 48.79,19.23 v48.79,23.95
D6
  Bottom 0.305: STM32.34 45.29,18.29 43.1,18.29 42.51,18.89 41.23,18.89 37.12,23 | 37.12,23 37,23 | 37.12,23 36.65,23 36.46,23.19 35.6,23.19 35.18,23.61 35.18,24.09 34.49,24.78 34.49,25.72 34.12,26.09 28.77,26.09 26.45,28.41 26.45,29.07 24.93,30.59 17.83,30.59 17.46,30.96 | TB3.22 15.21,33.96 15.21,33.21 17.46,30.96 | 17.46,30.96 17.63,30.79
D7
  Bottom 0.305: STM32.38 43.67,20.25 43.66,20.26 41.8,20.26 37.03,25.03 | 37.03,25.03 36.78,25.28 | 37.03,25.03 36.06,26 34.85,26 34.31,26.54 28.96,26.54 26.9,28.61 26.9,29.26 25.12,31.04 18.02,31.04 17.53,31.53 | TB3.21 15.85,33.22 17.53,31.53 | 17.53,31.53 17.82,31.24
D8
  Bottom 0.305: STM32.39 45.3,20.72 41.99,20.72 36.21,26.5 35,26.5 34.5,27 29.15,27 27.36,28.79 27.36,29.45 26.15,30.65 | TB3.17 18.45,33.24 20.19,31.5 25.31,31.5 26.15,30.65 | 26.15,30.65 26.4,30.4
D9
  Bottom 0.305: STM32.40 43.6,21.25 | 43.6,21.25 43.58,21.23 | 43.6,21.25 42.1,21.25 36.31,27.04 35.16,27.04 34.74,27.47 29.33,27.47 27.82,28.98 27.82,29.64 25.71,31.74 25.71,31.79 25.46,32.04 20.3,32.04 19.07,33.27 19.07,33.95 TB3.16
D10
  Bottom 0.305: 48.29,27.21 STM32.51 48.29,27.21 | 48.29,27.21 48.29,28.88 51.06,31.65 55.29,31.65 56.45,32.8 TB2.22
D11
  Bottom 0.305: STM32.52 48.79,27.21 48.79,28.73 51.25,31.19 54,31.19 | 54,31.19 54.22,31.19 | 54,31.19 54.5,31.19 | 54.5,31.19 54.84,31.19 | TB2.21 57.07,34 57.07,32.78 55.48,31.19 54.5,31.19
D12
  Bottom 0.305: STM32.53 49.29,27.21 49.29,28.59 51.4,30.69 55.69,30.69 56.85,31.85 59.68,31.85 59.68,34.01 TB2.17
D13
  Bottom 0.305: STM32.2 57.56,24.75 60.02,27.21 | 60.02,27.21 60.05,27.21 | TB4.16 81,36.14 80.17,36.96 78.66,36.96 78.31,37.31 | 78.31,37.31 78.21,37.41 | 78.31,37.31 78.21,37.41 | 60.02,27.21 63.3,30.49 64.26,30.49 65.11,31.34 66.93,31.34 66.93,31.36 72.98,37.41 78.21,37.41
D14
  Bottom 0.305: 56.71,24.21 STM32.3 57.74,24.25 59.99,26.51 | 59.99,26.51 60.32,26.84 | TB4.17 80.34,34.52 80.36,34.52 80.36,36.13 79.98,36.5 78.47,36.5 78.02,36.95 73.17,36.95 72.67,36.45 72.67,36.41 67.14,30.89 67.14,30.88 65.3,30.88 64.45,30.04 63.52,30.04 59.99,26.51
D15
  Bottom 0.305: STM32.4 57.88,23.75 60.32,26.18 | 60.32,26.18 60.55,26.42 | 72.5,35.27 74.38,35.27 74.38,35.93 77.48,35.93 77.75,35.66 TB4.21 77.77,33.99 | 72.5,35.27 72.3,35.27 | 60.32,26.18 63.71,29.58 64.64,29.58 65.48,30.43 68.33,30.43 69.5,31.59 70.97,31.59 70.97,33.94 72.3,35.27 72.5,35.27
D16  (1 unrouted)
  Bottom 0.305: STM32.54 49.79,27.21 49.79,28.44 51.59,30.23 55,30.23 | 55,30.23 55.23,30.23 | TB2.16 60.34,31.79 59.91,31.36 57.01,31.36 55.88,30.23 55,30.23 | 56.7,18.72 61.11,18.72 64.17,21.78 64.17,27.58 66.1,29.51 67.24,29.51 67.3,29.46 68.65,29.46 69.88,30.68 71.44,30.68 72.76,32 72.76,34.81 74.83,34.81 74.83,35.48 77.09,35.48 TB4.22
D+  (via drill 0.35)
  Top 0.2: 18.65,10.96 18.59,11.02 18.59,11.22
  Top 0.305: USB.3 18,9.56 18.65,9.56 18.65,10.87 | 18.65,10.91 18.65,10.96 | 18.59,10.81 18.59,11.22 BLC.6
  Top 0.406: v19.4,11.07 18.76,11.07 18.65,10.96 | 18.65,10.87 18.59,10.81
  Bottom 0.406: v19.4,11.07 16.73,11.07 15.65,9.99 15.32,9.99 12.35,7.02 9.99,7.02 J2.1
D-  (via drill 0.35)
  Top 0.305: BLC.4 16.94,11.31 16.94,9.86 | 17.2,9.86 USB.2
  Top 0.406: 17.2,9.86 16.94,9.86 v16.63,9.86
  Bottom 0.305: 13,3.96 16.73,3.96 17.5,4.73
  Bottom 0.406: J1.2 12,2.96 13,3.96 | 17.5,4.73 18,4.73 18,9.01 17.48,9.01 v16.63,9.86
DATA0
  Top 0.305: TLE4945L3.3 54.81,7.58 56.16,7.58 56.16,9.33 ADS.4
  Bottom 0.61: 54.84,6.93 TLE4945L3.3
DATA1
  Top 0.305: ADS.5 56.7,6.95 TLE4945L10.3
DATA2
  Top 0.305: ADS.6 56.7,10.13 58.69,10.13 58.69,6.93 TLE4945L2.3
  Bottom 0.61: TLE4945L2.3
DATA3
  Top 0.305: TLE4945L1.3 61.81,6.93 61.81,10.59 57.24,10.59 57.24,14.25 56.2,14.25 ADS.7
DATA4
  Top 0.305: ADS1.4 9.71,26.89 9.71,26.3 9.37,25.97 TLE4945L7.3
DATA5
  Top 0.305: ADS1.5 7.68,28.5 TLE4945L4.3
DATA6
  Top 0.305: ADS1.6 7.65,22.83 TLE4945L6.3
DATA7
  Top 0.305: TLE4945L5.3 8.04,21.83 9.76,21.83 ADS1.7
DATA8
  Top 0.305: TLE4945L8.3 67,8.03 68.01,8.03 68,8.03 ADS2.4
DATA9
  Top 0.305: ADS2.5 69.55,9.45 TLE4945L12.3
DATA10
  Top 0.305: ADS2.6 68.5,10.26 70.01,10.26 70.01,8.26 70.9,8.26 70.9,6.92 TLE4945L11.3
DATA11
  Top 0.305: ADS2.7 68.04,13.55 68.04,14.36 68.99,14.36 68.99,10.71 70.46,10.71 70.46,8.71 73.47,8.71 73.47,6.93 TLE4945L9.3
DATA12
  Top 0.305: ADS3.4 9.46,15.01 9.46,14.42 9.28,14.24 8.72,14.24 8.52,14.45 TLE4945L16.3
  Bottom 0.813: TLE4945L16.3
DATA13
  Top 0.305: ADS3.5 7.08,16.97 TLE4945L13.3
  Bottom 0.813: 7.1,16.98 TLE4945L13.3
DATA14
  Top 0.305: ADS3.6 7.95,12 TLE4945L15.3
DATA15
  Top 0.305: ADS3.7 9.46,10.91 9.46,10.33 9.28,10.14 7.79,10.14 TLE4945L14.3
GND  (via drill 0.35, 0.5, 0.6, 0.8)
  Top 0.254: R14.2 50.15,30.44 J25.2 | C20.2 10.35,38.95 10,39.3 3.15,39.3 J39.2
  Top 0.305: ADS2.3 67.45,9.45 67.45,8.64 66.55,8.64 | 66.55,8.64 66.55,9.45 ADS2.1 | 66.55,8.64 66.55,8.49 65.65,8.49 65.65,1.84 TLE4945L8.1 | ADS.3 55.7,8.37 53.52,8.37 | 53.52,8.37 53.52,1.7 54.81,1.7 TLE4945L3.1 | C5.1 53.52,9.77 53.52,8.37 | 13.8,6 13.8,8.25 13.91,8.25 v13.91,10.62 | 20.98,9.22 USB.M4 | BLC.2 18,13.37 17.99,13.38 17.11,13.38 16.54,12.81 v16.54,12.69 | 2,13.23 v8.5,13.23 9.98,13.23 10,13.25 ADS3.3 10,14.32 10.45,13.87 11,14.42 ADS3.1 | ADS1.3 10.21,26.89 10.21,26.16 8.7,24.66 3.31,24.66 TLE4945L7.1 | C13.- 19.2,37.81 | C21.2 60,28.26 60,26.99 60,26.87 | 38.5,36.2 38.53,36.2 | C26.2 39.7,27.46 36.23,30.93 v35.19,30.93 34.26,30 C12.2 | v54.69,19.41 52.94,19.41 v52.65,19.7 51.66,19.7 C27.2 | C8.2 33,41.65 33,45
  Top 0.406: 19.2,37 19.2,37.81 | 38.5,36.2 39.5,37.2 39.5,37.5 40.08,37.5 C7.- | C13.- 18.91,37.51 17.74,36.34 17.74,34.48 19.64,32.58 25.39,32.58 LM358.4 | v71.74,27.23 71.1,26.59 70.53,26.59 69.82,25.88 69.62,25.88 LM358*.4 | v74.6,33.16 75.71,33.16 C22.2 | 63.3,26.91 v63.22,26.99 | R3.2 23.28,37.32 23.28,37.64 24.19,38.55 24.19,39.74 25.68,39.74 26.06,39.36 25.99,39.29 25.99,39.08 | C23.2 64,33.37 v64.78,33.37 | R6.2 71.35,30.85 C10.2 | USB.5 19.75,8.25 | USB.M4 v20,8 | R4.2 66.8,33.99 65.42,35.37 65.42,36.17 65.5,36.25 v65.5,37
  Top 0.508: 89.12,38.17 89.23,38.17 | C9.- 60.74,37.5 | TLE4945L18.3 54.34,39.76 | C23.2 61.29,29.55 C21.2
  Top 0.61: X9.1 96,37.28 v96,28 | C33.2 77.76,5.63 C6.1 | TLE4945L3.1 57.34,1.85 TLE4945L10.1 59.88,1.87 TLE4945L2.1 TLE4945L1.1 TLE4945L8.1 | C28.1 71.95,10.61 C37.- | 60,26.99 v63.22,26.99 63.24,26.99 63.25,26.98 | 60,26.87 56.53,26.87 56.17,26.51 v56.17,26.39 | 37.63,14.52 SN65.2 38.2,14.52 37.09,13.4 | 37.09,13.4 35.35,11.66 35.35,11.61 34.01,10.27 26.17,10.27 23.9,8 USB.M4 | v65.5,37 65.5,39 64.5,39 63.42,40.08 | SN65.8 36.94,13.24 37.09,13.4 | v20,8 19.75,8.25
  Top 0.813: v78.35,11.37 76.37,11.37 C37.- 76.37,7.76 C33.2 | 75.44,24.75 75.44,22.31 C15.2 | 76,24.65 76,36.21 | v87.94,10.64 88.04,10.64 R1.2 | C36.- 80.4,38.17 C11.- 79.7,37.47 79.7,36.21 76,36.21 | TLE4945L8.1 TLE4945L12.1 TLE4945L11.1 TLE4945L9.1 77.76,1.85 77.76,5.63 | 8.47,7.56 3.91,7.56 TLE4945L14.1 2.02,11.98 TLE4945L15.1 2,13.23 TLE4945L16.1 TLE4945L13.1 TLE4945L5.1 TLE4945L6.1 TLE4945L7.1 TLE4945L4.1 | 22.39,2.51 USB.M1 | 21.33,2.7 22.8,2.7 23.52,1.98 TLE4945L24.3 26.67,1.96 TLE4945L23.3 31.72,1.96 TLE4945L22.3 34.29,1.92 TLE4945L21.3 36.87,1.94 TLE4945L20.3 TLE4945L19.3 J35.2 46.11,1.96 J31.2 J33.2 54.74,1.92 TLE4945L3.1 | C22.2 76.05,36.16 76,36.21
  Top 1.016: X9.1 93.17,38.17 89.23,38.17 C36.- | DIOD.A v95.87,17.02 95.87,18.06 94.01,18.06 v94.01,20 94.01,21.54 | 94.01,21.54 R5.1 | XL4015.1 94.01,21.71 94.01,21.54 | USB.M4 USB.M1 21.33,2.7 USB.M2 13.8,6 USB.M3 | C7.- 43.5,40.84 v43.5,44.5 | C13.- 22.5,40.51 v22.5,44.5 | C9.- 63.42,40.08 64,40.67 v64,44.5
  Bottom 0.305: 80,20 80,19.71 AMS_3.1 78.96,17.63 C16.2 80,17.63 80,18 | v56.17,26.39 55.26,26.39 55,26.13 54.5,26.13 54.3,26.33 54.3,27.11 STM32.63 54.2,27.23 | v54.69,19.41 54.85,19.57 55.51,19.57 55.69,19.74 STM32.12 57.86,19.75 58.95,20.84 62.49,20.84 63.54,21.89 63.54,26.67 v63.22,26.99 | STM32.18 54.26,17.26 52.86,18.66 52.86,19.49 v52.65,19.7 | v16.54,12.69 15.9,12.69 13.91,10.7 v13.91,10.62 | C31.1 8.64,13.37 v8.5,13.23
  Bottom 0.406: v71.74,27.23 72.89,28.38 72.89,29.93 74.6,31.64 v74.6,33.16
  Bottom 0.61: v96,28 96,27 94,27 v94,20 v94.01,20 | J25.2 47.01,35 TLE4945L17.3 52.64,38.12 TLE4945L18.3 | J2.2 9.87,1.5 19.5,1.5 22,4 22,8 | 22,8 v20,8 | 22,8 22,15.5 | v65.5,37 68,37 68,36 65.37,33.37 v64.78,33.37
  Bottom 0.813: v78.35,11.37 80,11.37 | 80,11.37 80.69,11.37 80.69,10.76 | 80.69,10.76 85.61,10.76 85.74,10.63 v87.93,10.63 v87.94,10.64 87.91,10.67 95.87,10.67 v95.87,17.02 | 80,11.37 80,18 80,20 v94,20 | C17.2 88.77,6.28 C3.2 86.73,6.31 AMS_5.1 84.77,8.1 80.69,8.1 80.69,10.76 | J39.2 J29.2 1.89,32.99 J37.2 1.8,28.7 TLE4945L4.1 | R34.1 27.76,41.26 27.76,47.21 43.5,47.21 48.5,47.21 | 48.5,47.21 63.5,47.21 69,47.21 | 69,47.21 89.12,47.21 | 89.24,47.09 89.24,39.5 | 89.24,39.5 89.24,38.26 | 88.93,39.19 89.04,39.3 | R28.1 89.04,39.3 | 89.04,39.3 89.24,39.5 | R25.1 69,41.05 69,47.21 | R31.1 48.5,41.36 48.5,47.21
  Bottom 1.016: C35.2 96.21,37.28 X9.1 90.22,37.28 | C38.1 90.22,37.28 | v43.5,44.5 43.5,47.21 | v22.5,44.5 22.5,47 22.71,47.21 27.76,47.21 63.5,47.21 | 63.5,47.21 89.12,47.21 89.24,47.09 89.24,38.26 90.22,37.28 | v64,44.5 64,46.71 63.5,47.21
  pour Top (isolate 0.406, rank 2): 0,49 98,49 98,0 0,0
  pour Bottom (isolate 0.406, rank 2): 0,49 98,49 98,0 0,0
MOTOR_1  (via drill 0.35)  (1 unrouted)
  Top 0.406: v84.06,36.85 82.43,35.22 v79.7,35.22 79.7,34.52 79.23,34.05 79.23,32.48 78.88,32.13 78.18,32.13 78.18,31.46 v77.97,31.25 | LM358*.3 69.61,24.65 73.47,24.65 74.98,26.15 v74.98,28.85
  Bottom 0.406: TB4.3 77.43,41.22 TB4.4 | 81.5,41.22 TB4.9 81.5,41.22 | 81.5,41.22 81.63,41.22 81.5,41.22 | TB4.18 v79.69,35.22 v79.7,35.22 | v84.06,36.85 84.06,38.86 R28.2 | v77.97,31.25 75.57,28.85 v74.98,28.85
  Bottom 0.61: 81.5,41.22 81.34,41.05 81.34,39.96 80.76,39.96 80.76,39.95 79.5,39.95 77.42,39.95 77.39,39.98 77.39,41.17 77.43,41.22
  Bottom 0.813: 81.34,39.96 82.11,39.19 82.22,39.3 R28.2
MOTOR_2  (via drill 0.35)  (4 unrouted)
  Top 0.406: v39,35.5 41,35.5 v43,37.5 | LM358.5 30.5,32.5 v29,32.5
  Bottom 0.406: TB1.18 38.41,34.91 v39,35.5 | v43,37.5 43.5,38 R31.2 | v29,32.5 35.98,39.48 35.98,40.02
  Bottom 0.813: 43.2,39.5 R31.2 41.16,39.2 | 41.16,39.2 39.93,40.44 39.93,41.16 | 41.16,39.2 40.87,39.5 36.5,39.5 35.98,40.02 35.98,41.16 36.25,41.16
MOTOR_3  (via drill 0.35)  (4 unrouted)
  Top 0.406: v59.5,36 62,36 63.5,37.5 v64,37.5 64,35.77 65.26,34.51 | 65.28,34.49 65.26,34.51 | 65.26,34.51 65.89,33.88 65.89,32.53 64.68,31.32 64.68,26.54 64.4,26.26 LM358*.5
  Bottom 0.406: TB2.18 59.05,35.55 v59.5,36 | v64,37.5 64.3,37.8 R25.2
  Bottom 0.813: R25.2 61.31,39.19 61,39.5 | 61,39.5 57,39.5 57,39.94 56.73,40.21 56.73,40.99 56.61,41.11 56.61,41.27 56.88,41.27 | 61,39.5 60.56,39.94 60.56,41.27 60.83,41.27
MOTOR_4  (via drill 0.35)  (1 unrouted)
  Top 0.406: v18.77,35.41 19.61,35.41 21.5,37.3 | 21.5,37.3 21.12,36.92 21.12,34.11 25.4,34.11 | 21.5,37.3 21.5,37.68 22.32,38.5 v23,38.5
  Bottom 0.406: TB3.3 15.5,41.23 TB3.4 | TB3.9 19.45,41.23 TB3.10 | v23,38.5 23,39.22 R34.2 | TB3.18 17.8,35.4 17.83,35.43 18.75,35.43 v18.77,35.41
  Bottom 0.813: 15.5,41.23 15.5,39.89 16.02,39.89 16.04,39.86 19.41,39.86 | 19.41,39.86 19.45,39.9 19.45,41.23 | 19.41,39.86 22.36,39.86 R34.2
N$1  (via drill 0.35)
  Top 0.305: ADS.2 55.2,10.32 v55.29,10.41
  Bottom 0.305: v55.29,10.41 54.62,11.08 54.62,12.2 54.85,12.43 57.44,12.43 R8.1
  other vias: 58.45,11.42
N$2
  Top 0.813: R1.1 LED2.C
N$3  (via drill 0.35, 0.6)
  Top 0.406: USB.1 16.4,8.54 v16.17,8.77 15.27,9.67 v15.27,10.82 | D1.A 16.22,15.15 v16.22,14.22
  Bottom 0.406: v16.22,14.22 17.44,13 17.5,13 17.5,12.13 17.15,11.78 16.35,11.78 15.39,10.82 v15.27,10.82
  Bottom 0.61: J1.1 12.9,5.5 v16.17,8.77
N$4
  Top 0.305: ADS2.2 67,10.5 66,10.5 65.15,9.65 R9.1
N$5  (via drill 3 pad 6)
  other vias: 4,45
N$6
  Bottom 0.305: TB1.2 TB1.1
  Bottom 0.813: X4.1 30.4,41.16 TB1.1
N$7
  Top 1.016: XL4015.4 94.01,26.81 C32.2
N$8
  Bottom 0.508: X4.2 37.77,44.17 TB1.6 TB1.5
N$9  (via drill 0.8)
  Top 0.305: 83,23 83.35,23.35 83.35,25.38
  Top 1.016: 83,22.84 83,23 81,23 | XL4015.3 84,25.11 84,26 84,25 85,25 | 85,25 82,25 85,25 | 85,25 85,25.38 83.35,25.38 XL4015.6 83.35,20.03 92.16,20.03 L2.1 92.16,10.38 DIOD.C
  other vias: 80.5,29 80.5,26.5 80.5,24 80.5,21.5 86.5,29 86.5,26.5 86.5,24 86.5,21.5
  pour Top (isolate 0.61, no thermals): 78.5,33 95,33 95,17.5 95,16 98,13 98,7 84.5,7 84.5,17 78,17 78,33
  pour Bottom (isolate 0.61, no thermals): 79.5,31 90,31 91.5,29.5 91.5,27.5 91.5,19.5 91,20 80,20
N$10
  Bottom 0.305: TB1.11 TB1.12
  Bottom 0.813: X3.2 45.8,41.16 TB1.12
N$11  (1 unrouted)
  Bottom 0.508: TB1.7 38.41,44.17 X3.1 | TB1.8 TB1.7 TB1.8
N$12  (via drill 0.35)
  Top 0.305: v61.12,23.43 61.71,24.02 C2.1 | v55.42,22.24 55.59,22.41 R13.1
  Bottom 0.305: v61.12,23.43 59.93,22.24 58.04,22.24 58.03,22.25 STM32.7 v55.43,22.25 v55.42,22.24
N$13  (via drill 0.35)
  Top 0.305: C19.1 57.62,24.27 v58.51,23.38 58.12,22.98 CR.3
  Bottom 0.305: STM32.5 58.38,23.25 v58.51,23.38
N$14
  Bottom 0.305: TB2.2 TB2.1
  Bottom 0.813: X6.1 51.03,41.27 TB2.1
N$15
  Bottom 0.508: X6.2 58.4,44.17 TB2.6 TB2.5
N$16  (via drill 0.35)
  Top 0.305: C18.1 59.67,23.64 v59.57,23.54 59.93,23.54 60.82,22.65 60.82,21.13 59.87,20.18 CR.1
  Bottom 0.305: STM32.6 58.17,22.75 58.23,22.7 58.79,22.7 59.19,23.1 59.19,23.16 v59.57,23.54
N$17
  Top 0.305: ADS3.2 10.5,15.68 9.52,16.66 R10.2
N$18
  Bottom 0.305: TB2.12 TB2.11
  Bottom 0.813: X5.2 66.43,41.27 TB2.12
N$19
  Top 0.305: ADS1.2 10.75,27.64 9.68,28.71 R11.2
N$20  (via drill 0.35)
  Top 0.254: v52.6,25.52 52.6,26.75 R14.1
  Bottom 0.254: STM32.60 52.75,25.67 v52.6,25.52
N$21  (via drill 3 pad 6)
  other vias: 4,4
N$22  (via drill 0.35)
  Top 0.305: C26.1 41.95,26.27 43.34,24.88 v43.84,24.88
  Bottom 0.305: STM32.47 43.97,24.75 v43.84,24.88
N$23  (1 unrouted)
  Bottom 0.508: X5.1 59.05,44.16 TB2.7 TB2.8
N$29
  Top 0.406: R12.2 69.13,34.35 68.85,34.35 68.73,34.23 68.5,34 | LM358*.6 65.95,24.64 66.31,24.99 66.31,27.49 | 66.29,27.53 66.29,28 66.31,27.98 66.31,27.49 | 66.31,27.49 66.31,31.45 68.5,33.64 68.5,34 | 68.5,34 R4.1
N$31
  Top 0.406: 73.36,30.27 73.05,30.4 | 73.36,30.27 R26.2 70.62,28.79 68.11,26.28 68.11,24.16 68.91,23.36 LM358*.2 | 73.36,30.27 73.15,30.48 R6.1
N$32  (via drill 0.6)
  Top 0.61: R16.1 96.17,25.37 v96.22,25.37
  Top 1.016: XL4015.2 94.04,23.41 R5.2 R16.1
  Bottom 0.61: v96.22,25.37 96.22,23.45 C34.2
N$33
  Bottom 0.508: TB4.1 TB4.2
  Bottom 0.813: X8.1 71.66,41.22 TB4.1
N$34
  Bottom 0.406: TB4.6 TB4.5
  Bottom 0.508: X8.2 79.05,44.16 TB4.6
N$35
  Bottom 0.508: TB4.12 TB4.11
  Bottom 0.813: X7.2 87.06,41.22 TB4.12
N$36  (1 unrouted)
  Bottom 0.406: TB4.8 TB4.7
  Bottom 0.508: X7.1 79.7,44.16 TB4.7
N$38
  Top 0.406: R29.2 32.78,33.87 LM358.6 28.86,33.87 28.83,33.83 28.83,36.87 29.61,37.65 R2.1
N$39  (via drill 3 pad 6)
  other vias: 94,4
N$41  (1 unrouted)
  Bottom 0.508: TB3.1 TB3.2
  Bottom 0.813: X2.1 9.79,41.23 TB3.1
N$42
  Bottom 0.508: X2.2 17.14,44.2 TB3.6 TB3.5
N$43
  Bottom 0.508: TB3.11 TB3.12
  Bottom 0.813: TB3.12 25.16,41.23 X13.2
N$44  (1 unrouted)
  Bottom 0.508: TB3.8 17.8,41.23 | TB3.7 17.8,44.19 X13.1
N$45  (via drill 0.35)
  Top 0.305: C27.1 49.35,19.09 48.94,19.09 48.2,19.09 47.49,18.38 v47.49,18.21
  Bottom 0.305: STM32.31 47.75,18.21 v47.49,18.21
N$47  (via drill 3 pad 6)
  other vias: 94,45
N$48
  Top 0.406: LM358.2 24,35.13 | 24,35.13 23.5,35.13 | 23.5,35.13 23.02,35.13 | R32.2 24.5,38 23.89,37.39 23.89,35.52 23.5,35.13 | R3.1 22.95,35.13 24,35.13
N$49
  Top 0.305: R23.1 20.39,11.93 19.04,11.93 18.5,12.47 BLC.1
N$50
  Top 0.305: R24.1 15.68,11.96 17.12,11.96 17.5,12.34 BLC.3
N$53
  Top 0.61: J33.1 48.65,5.41 R41.2 51.22,7.58 R42.2
  Top 0.813: J35.1 43.53,4.47 J31.1 J33.1
N$55
  Top 0.813: R40.2 4.34,31.23 J37.1 4.43,32.99 J29.1 J39.1
  Bottom 0.813: J29.1 4.5,35.4 4.5,33.06 | 4.5,33.06 J37.1 | R43.2 4.5,30.79 4.5,33.06
PW_3  (via drill 0.35)
  Top 0.305: v43,29.45 43,31.57 42.07,32.5 v42,32.5
  Bottom 0.305: STM32.16 55.21,17.75 53.87,19.09 53.87,22.07 49.96,25.97 47.16,25.97 46.68,26.45 46.68,27 | 46.68,27 46.68,27.42 46.48,27.62 46.45,27.62 46,28.06 46,29 45.96,29.04 43.5,29.04 | 46.68,27 46.68,27.31 | 43.5,29.04 43.33,29.04 | TB1.15 40.37,33 40.87,32.5 v42,32.5 | 43.5,29.04 43.4,29.04 v43,29.45
PW_4  (via drill 0.35)
  Top 0.305: v42.13,30.86 40.8,30.86 v39.82,29.88
  Bottom 0.305: STM32.17 54.75,16.5 54.75,17.51 53.35,18.91 53.35,21.94 49.77,25.51 46.98,25.51 46.22,26.27 46.22,27.2 45.54,27.88 45.54,28.59 42.85,28.59 42.28,29.16 42.28,30.71 v42.13,30.86 | TB1.23 35.16,32.91 36.54,31.54 36.75,31.33 37,31.33 38.69,31.33 39.82,30.2 v39.82,29.88
PW_5
  Bottom 0.305: STM32.55 50.29,27.21 50.29,27.5 50.29,28.29 51.78,29.77 54,29.77 | 54,29.77 54.25,29.77 | 54,29.77 56.07,29.77 57.15,30.85 60.05,30.85 61.02,31.82 61.02,34 TB2.15
PW_6
  Bottom 0.305: 51.27,27.93 51.25,27.91 STM32.57 51.25,27.96 52.15,28.86 58.86,28.86 60.95,30.95 64.07,30.95 64.94,31.82 66.72,31.82 66.72,31.8 72.79,37.87 78.4,37.87 78.85,37.41 80.36,37.41 81.65,36.13 TB4.15
PW_7  (via drill 0.35)  (1 unrouted)
  Top 0.305: v57.5,30.17 55.34,32.33 v54.58,32.33
  Bottom 0.305: TB4.23 76.39,33.97 76.39,35.02 75.29,35.02 75.29,34.36 73.22,34.36 73.22,31.5 71.94,30.22 70.06,30.22 68.84,29 67.11,29 67.05,29.05 66.32,29.05 64.63,27.36 64.63,21.48 61.4,18.24 STM32.15 | 54,29.32 51.97,29.32 50.79,28.14 50.79,27.21 | 54,29.32 54.26,29.32 | TB2.23 55.8,32.8 55.25,32.25 54.66,32.25 v54.58,32.33 | 54,29.32 56.26,29.32 57.11,30.17 v57.5,30.17
PW_10  (via drill 0.35)
  Top 0.305: v36,24 35.43,24 34.68,24.75 34.68,26.67 33.81,27.54 26.81,27.54 v26.39,27.12
  Bottom 0.305: STM32.35 43.5,18.75 | 43.5,18.75 43.43,18.75 43.42,18.76 | 43.5,18.75 43.46,18.79 43.25,18.79 42.7,19.35 41.42,19.35 36.63,24.13 36.13,24.13 v36,24 | TB3.23 14.54,33.23 17.64,30.13 23,30.13 24.74,30.13 25.93,28.94 25.93,27.58 v26.39,27.12
PW_20  (via drill 0.35)
  Top 0.305: v29.52,28.27 29.79,28 34,28 35.5,26.5 v35.5,25
  Bottom 0.305: TB3.15 19.79,33.93 19.79,33.2 20.49,32.5 26.17,32.5 26.17,31.93 29.52,28.58 v29.52,28.27 | STM32.36 43.5,19.25 | 43.5,19.25 43.44,19.25 43.42,19.27 | 43.5,19.25 42.94,19.81 41.61,19.81 36.41,25 v35.5,25
SCL1  (via drill 0.35)
  Top 0.305: ADS3.10 12.29,12.24 12.29,15.39 13.4,16.5 13.4,17.5 14.15,18.25 13.4,19 13.4,19.5 | ADS1.10 11.21,22.79 | 11.21,22.79 11.21,21.69 13.4,19.5 | J36.1 9.48,30.97 9.8,30.65 11.96,30.65 12.96,29.65 12.96,26.77 11.21,25.01 11.21,22.79 | 13.4,19.5 14.4,20.5 v16.5,20.5 | v51,25.9 50.98,25.88 50.98,23.18 49.4,21.6 43.95,21.6 42.85,20.5 v37.5,20.5
  Bottom 0.305: J36.1 9.52,32.9 J28.1 9.52,35.5 9.52,35.51 9.52,37.98 J38.1 | STM32.58 51.75,26.65 v51,25.9 | v16.5,20.5 v37.5,20.5
  Bottom 0.508: 9.52,35.51 10.82,36.81 R20.2
SCL2  (via drill 0.35)  (1 unrouted)
  Top 0.254: J34.1 48.98,9.56 48.98,13.01 54.7,13.01 ADS.10 | 48.25,9.6 48,9.6
  Top 0.305: ADS2.10 66.5,12.77 63.11,12.77 63.11,13.5 | R22.2 63.11,13.5 | ADS.10 54.7,15.16 56.25,15.16 | 56.25,15.16 59.06,15.16 59.06,13.5 63.11,13.5 | v49.06,17.52 49.06,17.57 53.78,17.57 54.43,16.93 | 54.43,16.93 54.68,16.67 | 54.43,16.93 56.19,15.16 56.25,15.16
  Top 0.813: J30.1 43.5,9.56 J32.1 47.32,9.56 47.39,9.49 47.5,9.49 47.61,9.49 47.89,9.49 48,9.49 48.11,9.49 48.18,9.56 J34.1
  Bottom 0.305: STM32.29 48.75,17.2 v49.06,17.52
SDA1  (via drill 0.35)
  Top 0.305: ADS3.9 10.5,11.51 10.76,11.77 11.19,11.77 11.86,12.44 11.86,13.5 11.86,16.54 12.41,17.09 12.94,17.62 12.94,19.31 10.75,21.5 ADS1.9 10.75,25.2 12.51,26.96 12.51,29.46 11.77,30.19 9.61,30.19 J36.2 | v51.71,25.26 51.71,23.03 49.77,21.09 44.23,21.09 42.5,19.37 36.63,19.37 v36.5,19.5
  Top 0.406: J38.2 7,37.96 7,35 7,35.41 J28.2 6.98,32.9 J36.2 | 12.41,17.09 v12.35,17.09
  Bottom 0.305: STM32.59 52.25,26.14 51.71,25.6 v51.71,25.26 | 16.42,17.09 18.83,19.5 v36.5,19.5
  Bottom 0.406: v12.35,17.09 16.42,17.09
  Bottom 0.508: J36.2 8.85,30.95 R19.2
SDA2  (via drill 0.35)  (1 unrouted)
  Top 0.254: ADS.9 55.2,12.57 54.27,12.57 54.27,12.6 50.18,12.6 50.18,11 | 50.01,7.04 50.01,10.83 50.18,11 | 50.18,11 50.18,11.71
  Top 0.305: 65,12.31 67,12.31 ADS2.9 66.99,13.55 66.99,14.36 66.61,14.36 | 65,12.31 64.75,12.31 | 66.61,14.36 65.39,14.36 R21.2 | 65,12.31 58.57,12.31 58.57,14.71 55.24,14.71 55.24,13.43 ADS.9 | 46.11,6.97 46.15,7 J32.2 | 46.11,6.97 48.86,7 47,7 | v66.52,14.92 66.61,14.83 66.61,14.36 | v48.46,18.24 48.49,18.21 53.79,18.21 56.38,15.62 59.25,15.62 59.51,15.35 59.51,14.27 61.24,14.27 v61.28,14.31 | J34.2 48.67,7.04 50.01,7.04
  Top 0.813: 46.11,6.97 46,6.97 45.89,6.97 45.82,7.04 J30.2 | J32.2 46.11,6.97
  Bottom 0.305: STM32.30 48.25,18.09 48.4,18.24 v48.46,18.24 | v61.28,14.31 65.91,14.31 v66.52,14.92
SWCLK  (via drill 0.35)
  Top 0.305: J23.2 46.73,30.69 v46.73,28.3
  Bottom 0.305: v46.73,28.3 47.25,27.78 STM32.49
SWDIO  (via drill 0.35)
  Top 0.305: v46.79,23.41 46.29,23.91 46.29,24.64 45.35,25.58 44.9,25.58 43.71,26.77 43.71,27.72 44.5,28.51 J23.1
  Bottom 0.305: v46.79,23.41 46.37,23.83 46.37,24 46.12,24.25 STM32.46
USB_OTG_DM  (via drill 0.35)
  Top 0.305: R24.2 14.34,13.52 15.96,13.52 15.97,13.5 16.48,13.5 16.86,13.88 23.52,13.88 31.5,21.86 35.79,21.86 37.47,23.53 42.42,23.53 v42.22,23.73
  Bottom 0.305: v42.22,23.73 42.67,23.73 43.13,23.27 45.31,23.27 STM32.44
USB_OTG_DP  (via drill 0.35)
  Top 0.305: R23.2 23.05,12.69 v24.08,12.69 | v41.81,24.62 37.91,24.62 35.6,22.31 30.78,22.31 v23.94,15.47
  Bottom 0.305: v23.94,15.47 23.94,12.83 v24.08,12.69 | v41.81,24.62 42.49,24.62 43.34,23.76 STM32.45
USB_OTG_ID  (1 unrouted)
(copper drawn outside any net)
  shapes: Top area x2

## Text on the board
tNames: MOTOR
bNames: Curator - Krestovnikov / Designer - Luzhetsky / Board version - 0.2